# Altium PCB weihnachten.PcbDoc
Units mm, origin at the board's own origin, x right, y up, seen from the top; angles counter-clockwise.
Board outline 43.69 x 44.53 mm, 2 copper layers (Top Layer, Bottom Layer); 29 components, 29 nets, 106 pads, 8 vias.
Unrouted connection lines stored in the file: 1.
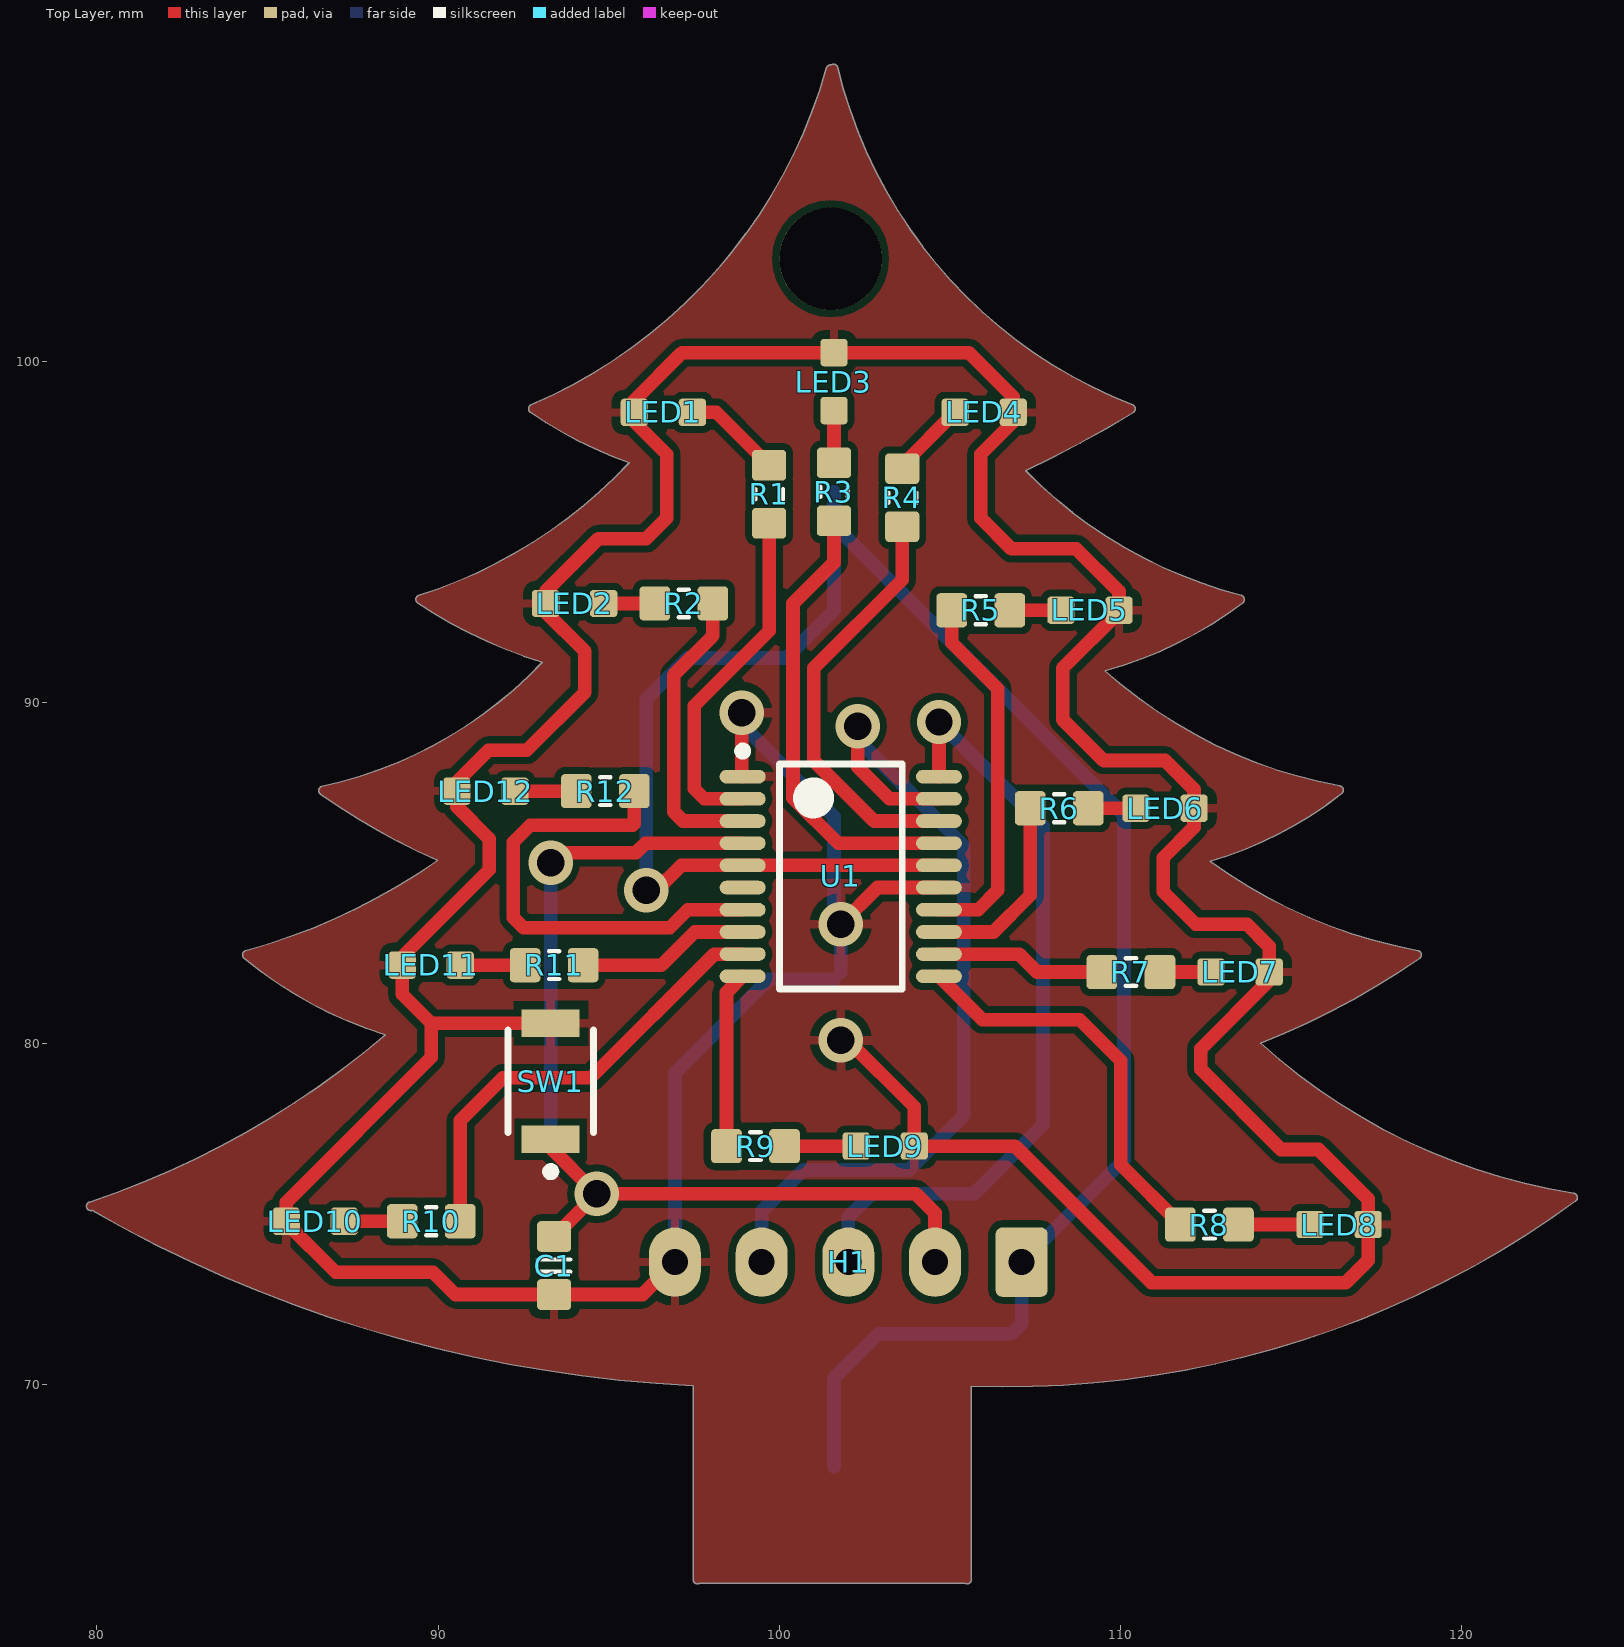
[diagram p0: Top Layer view]
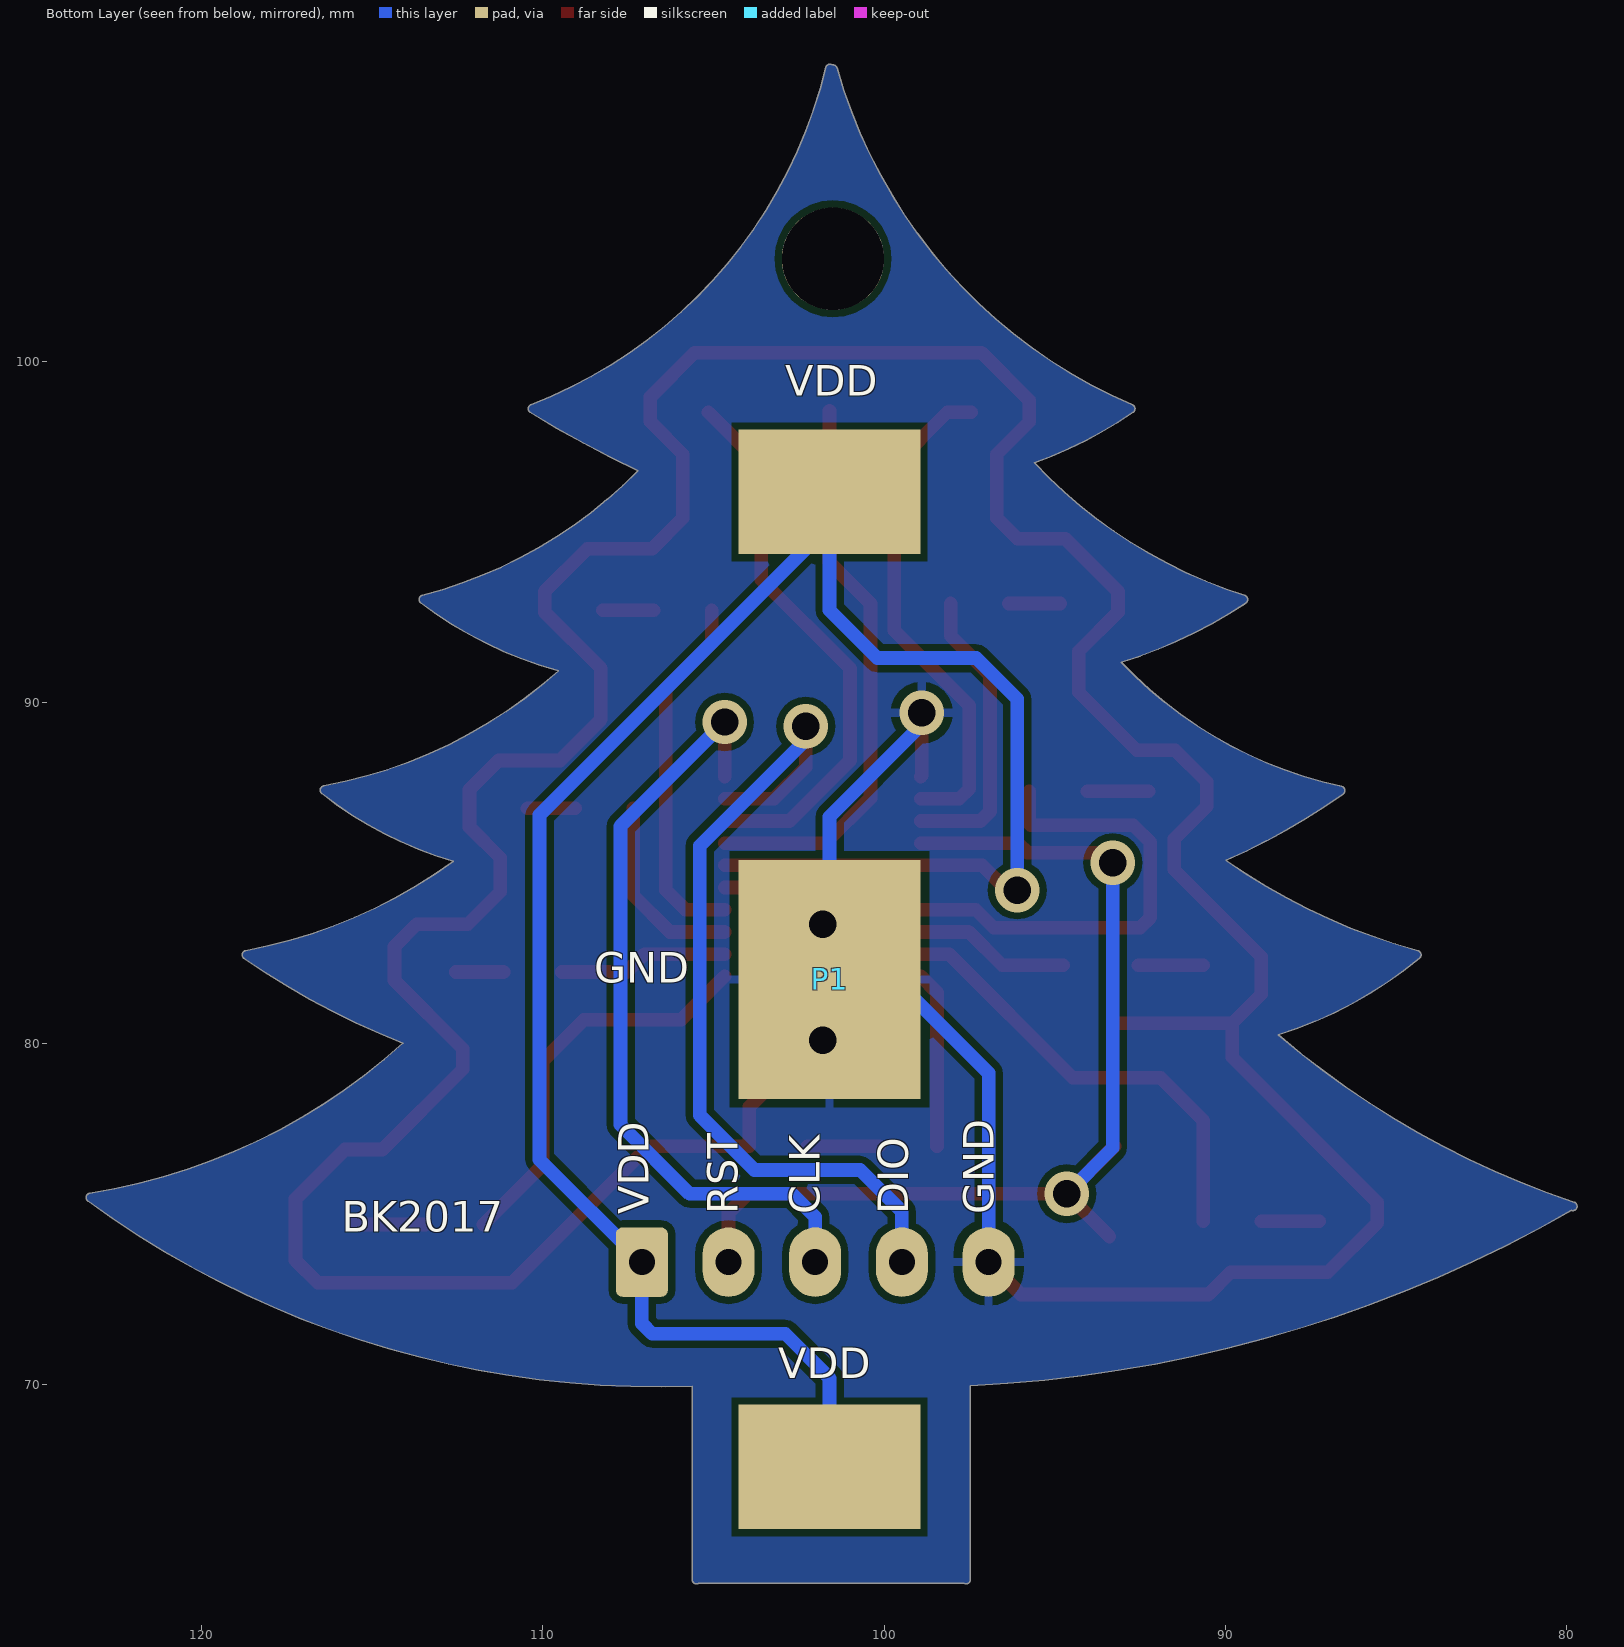
[diagram p1: Bottom Layer view, seen from below]
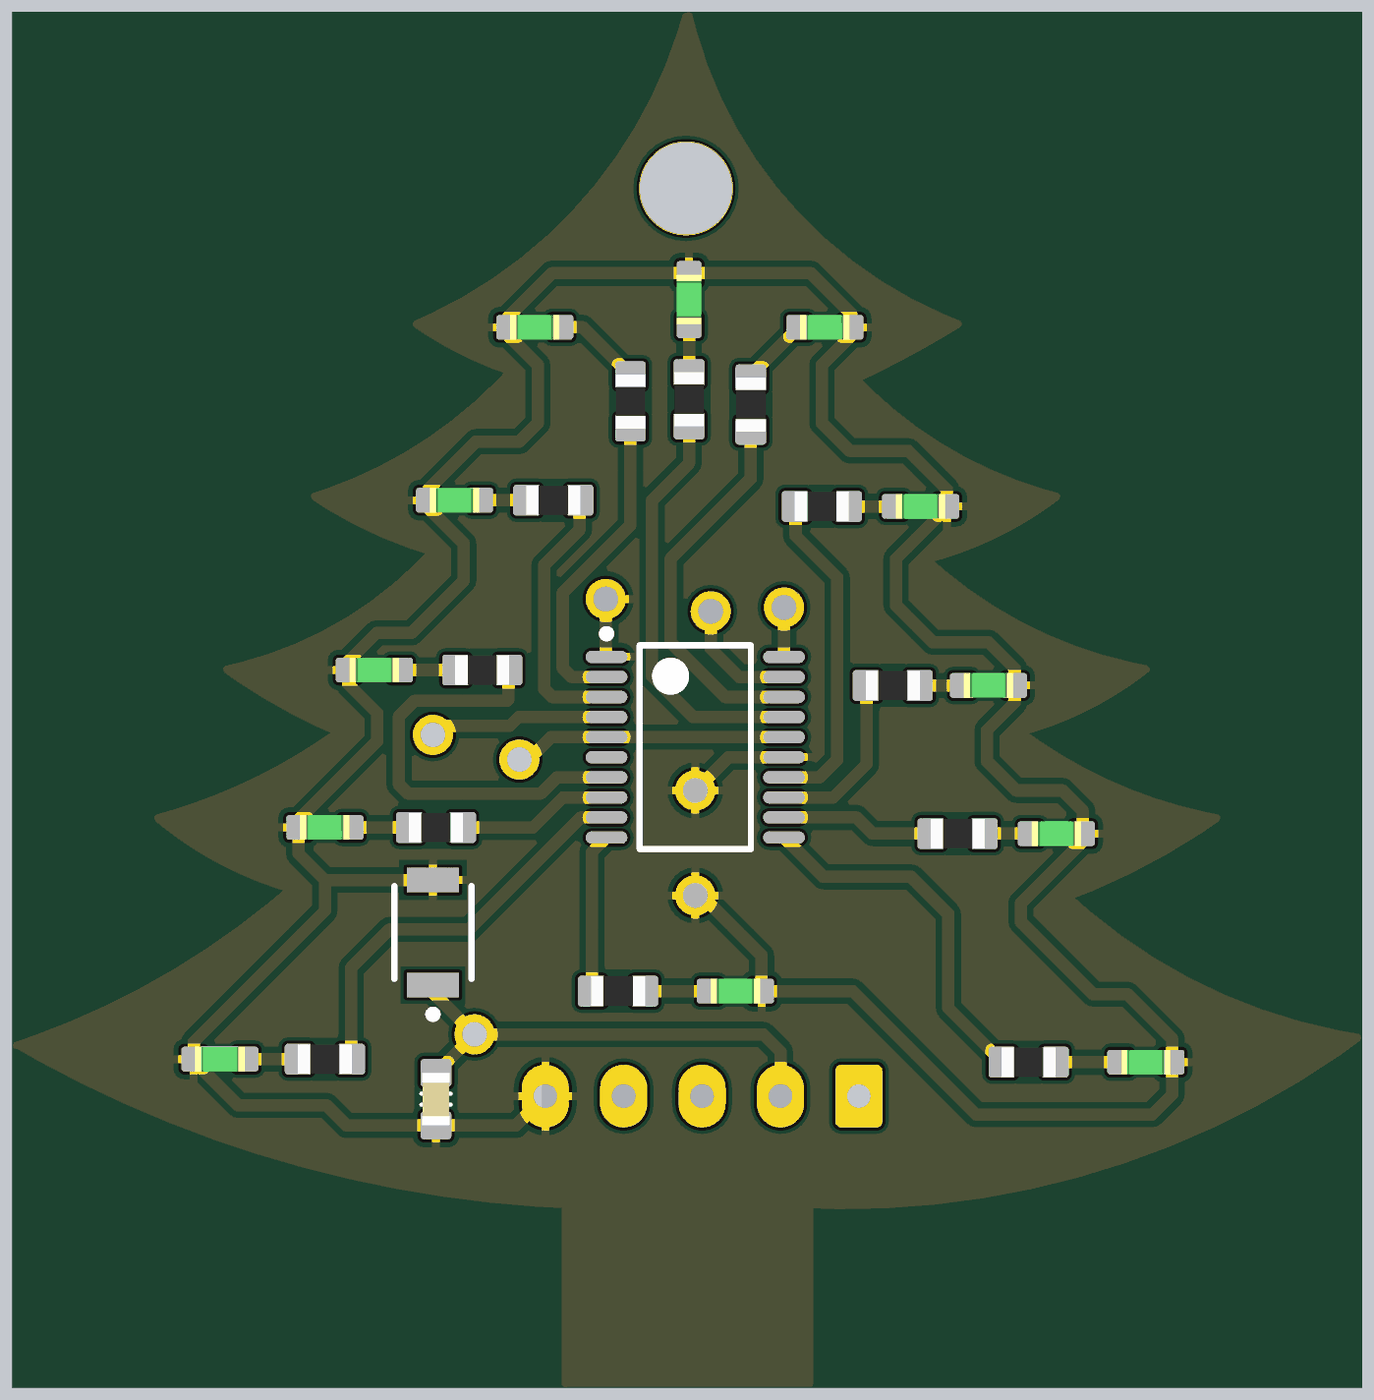
[diagram p2: 3D render of the assembled board from above, using the file's embedded part models]

## Layer stack, top to bottom
Top Solder: solder mask 0.0102, Solder Resist, Dk 3.5
Top Layer: signal copper 0.0356
Dielectric 1: dielectric 0.32, FR-4, Dk 4.8
Bottom Layer: signal copper 0.0356
Bottom Solder: solder mask 0.0102, Solder Resist, Dk 3.5

## Board outline
79.858,75.114 cw(c79.823,75.237) 79.783,75.358 ccw(c71.505,100.113) 88.453,80.261 cw(c92,91.748) 84.314,82.505 cw(c84.395,82.603) 84.268,82.603 cw(c84.395,82.603) 84.361,82.726 ccw(c79.608,100.116) 89.98,85.37 cw(c97.942,103.391) 86.555,87.314 cw(c86.628,87.417) 86.602,87.542 ccw(c83.937,99.814) 93.052,91.176 cw(c97.285,104.782) 89.405,92.911 cw(c89.475,93.017) 89.437,93.139 ccw(c85.083,106.873) 95.599,97.024 cw(c99.762,108.765) 92.705,98.5 cw(c92.777,98.605) 92.727,98.722 ccw(c86.739,112.697) 101.376,108.587 cw(c101.499,108.552) 101.516,108.679 cw(c101.587,108.573) 101.711,108.603 ccw(c115.439,111.89) 110.349,98.724 cw(c110.303,98.605) 110.43,98.605 cw(c110.303,98.605) 110.37,98.496 cw(c92.65,127.434) 107.216,96.788 ccw(c116.937,106.327) 113.532,93.14 cw(c113.5,93.017) 113.627,93.017 cw(c113.5,93.017) 113.577,92.915 cw(c106.333,102.494) 109.546,90.922 ccw(c118.983,101.487) 116.421,87.554 ccw(c118.983,101.487) 116.422,87.554 116.421,87.554 cw(c116.399,87.429) 116.526,87.429 cw(c116.399,87.429) 116.477,87.329 cw(c109.351,96.446) 112.62,85.345 ccw(c121.488,97.586) 118.708,82.728 cw(c118.685,82.603) 118.812,82.603 cw(c118.685,82.603) 118.758,82.498 cw(c105.931,100.982) 114.097,80.018 ccw(c126.093,93.266) 123.277,75.617 cw(c123.257,75.491) 123.384,75.491 cw(c123.257,75.491) 123.332,75.388 cw(c106.668,98.192) 105.627,69.968 105.627,64.3 cw(c105.5,64.3) 105.44,64.188 97.66,64.188 cw(c97.6,64.3) 97.473,64.3 97.473,69.978 cw(c99.31,109.053)

## Design rules (kind name [scope] priority, off if disabled: settings)
Clearance [All] p1: gap=0.203 ignorepadtopadclearanceinfootprint=FALSE
HoleSize [All] p1: absolutevalues=TRUE maxlimit=2.54 minlimit=0.3 maxpercent=80.000 minpercent=20.000
PolygonConnect [All] p1: connectstyle=Relief reliefconductorwidth=0.254 reliefentries=4 polygonreliefangle="90 Angle" airgapwidth=0.254
RoutingVias [All] p1: holewidth=0.8 width=1.2 viastyle="Through Hole" minholewidth=0.8 minwidth=1.2 maxholewidth=1 maxwidth=1.6
SolderMaskExpansion [All] p1: expansion=0.102
Width [All] p1: maxlimit=0.6 minlimit=0.3 preferedwidth=0.3
29 further rules are at their usual default settings.

## Components (designator, comment, footprint, x,y, rotation, side; value= is the part's Value field where it differs from the comment)
C1 "CAPC_2u2_0603_10V_10%" CAPC1608X90N 93.4,73.5 r90 top value=100n
H1 "Programmer" HDR1X5_2.54MMP 107.1,73.6 r180 top
LED1 "Green" LED-0603-GREEN 96.6,98.5 r180 top
LED2 "Green" LED-0603-GREEN 94,92.9 r180 top
LED3 "Green" LED-0603-GREEN 101.6,99.4 r90 top
LED4 "Green" LED-0603-GREEN 106,98.5 r0 top
LED5 "Green" LED-0603-GREEN 109.1,92.7 r0 top
LED6 "Green" LED-0603-GREEN 111.3,86.9 r0 top
LED7 "Green" LED-0603-GREEN 113.5,82.1 r0 top
LED8 "Green" LED-0603-GREEN 116.4,74.7 r0 top
LED9 "Green" LED-0603-GREEN 103.1,77 r0 top
LED10 "Green" LED-0603-GREEN 86.4,74.798 r180 top
LED11 "Green" LED-0603-GREEN 89.8,82.3 r180 top
LED12 "Green" LED-0603-GREEN 91.4,87.4 r180 top
P1 "BC-2013" BC-2013-ND 101.6,67.6 r90 bottom
R1 "Thick Film" RESC1608X55N 99.7,96.1 r90 top value=1K
R2 "Thick Film" RESC1608X55N 97.2,92.9 r180 top value=1K
R3 "Thick Film" RESC1608X55N 101.6,96.17 r90 top value=1K
R4 "Thick Film" RESC1608X55N 103.6,96 r90 top value=1K
R5 "Thick Film" RESC1608X55N 105.9,92.7 r0 top value=1K
R6 "Thick Film" RESC1608X55N 108.2,86.9 r0 top value=1K
R7 "Thick Film" RESC1608X55N 110.3,82.1 r0 top value=1K
R8 "Thick Film" RESC1608X55N 112.6,74.7 r0 top value=1K
R9 "Thick Film" RESC1608X55N 99.3,77 r0 top value=1K
R10 "Thick Film" RESC1608X55N 89.8,74.798 r180 top value=1K
R11 "Thick Film" RESC1608X55N 93.4,82.3 r180 top value=1K
R12 "Thick Film" RESC1608X55N 94.9,87.4 r180 top value=1K
SW1 "B3U-1000P" OMRON-B3U-1000_V 93.3,78.9 r90 top
U1 "STM32L031F6" STM32L031F6 101.8,84.9 r0 top

## Footprints (in the part's own frame and the unit in brackets; to place one, negate y for a bottom-side part, rotate by r counter-clockwise, add the part's x,y. Pads: shape width x height; smd on the part's side, far side on the other; paste and mask are expansions set on the pad)
BC-2013-ND [mm]
  rect 3.65x5.33 smd: 1(0,0) 1(28.57,0)
  rect 7x5.33 smd: 2(14.285,0)
  body extent -1.7,-4.76 30.3,4.76, height 3.68
CAPC1608X90N [mm] "Chip Capacitor, Body 1.6x0.8mm, EIA 0603, IPC Medium Density"
  round 0.254 on Mech15: 0(0,0)
  rrect25% 0.9x1 smd: 1(-0.85,0) 2(0.85,0)
  Top Layer pour cut-out: -0.6,0.5 -0.4,0.7 0.4,0.7 0.6,0.5 0.6,-0.5 0.4,-0.7 -0.4,-0.7 -0.6,-0.5
  silkscreen extent -0.18,-0.48 0.18,0.48, body extent -0.85,-0.45 0.85,0.45, height 0.89
HDR1X5_2.54MMP [mil] "Connector; Header; 5 Position 0.100\" pitch"
  rrect25% 60x80 hole 30: 1(0,0)
  oval 60x80 hole 30: 2(100,0) 3(200,0) 4(300,0) 5(400,0)
LED-0603-GREEN [mm]
  round 0.254 on Mech15: 0(0,0)
  rrect25% 0.8x0.8 smd: A(-0.85,0) K(0.85,0)
  Top Layer pour cut-out: -0.5,0.5 0.5,0.5 0.5,-0.5 -0.5,-0.5
  body extent -0.8,-0.4 0.8,0.4, height 0.75
OMRON-B3U-1000_V [mm] "SMD, 2-Leads, Body 3x2.5mm"
  rect 0.8x1.7 smd: 1(-1.7,0) 2(1.7,0)
  silkscreen extent -2.77,-1.25 1.5,1.25, body extent -1.5,-1.25 1.5,1.25, height 1.75
RESC1608X55N [mm] "Chip Resistor, Body 1.6x0.8mm, EIA 0603, IPC Medium Density"
  round 0.254 on Mech15: 0(0,0)
  rrect25% 0.9x1 smd: 1(-0.85,0) 2(0.85,0)
  Top Layer pour cut-out: -0.6,0.5 -0.4,0.7 0.4,0.7 0.6,0.5 0.6,-0.5 0.4,-0.7 -0.4,-0.7 -0.6,-0.5
  silkscreen extent -0.15,-0.41 0.15,0.41, body extent -0.87,-0.47 0.88,0.48, height 0.54
STM32L031F6 [mm] "TSOP, 20-Leads, Body 6,50x4,40mm, Pitch 0,65mm, IPC Medium Density"
  oval 1.35x0.4 smd: 1(-2.875,2.925) 2(-2.875,2.275) 3(-2.875,1.625) 4(-2.875,0.975) 5(-2.875,0.325) 6(-2.875,-0.325) 7(-2.875,-0.975) 8(-2.875,-1.625) 9(-2.875,-2.275) 10(-2.875,-2.925) 11(2.875,-2.925) 12(2.875,-2.275) 13(2.875,-1.625) 14(2.875,-0.975) 15(2.875,-0.325) 16(2.875,0.325) 17(2.875,0.975) 18(2.875,1.625) 19(2.875,2.275) 20(2.875,2.925)
  silkscreen extent -3,-3.3 1.8,3.8, body extent -2.2,-3.3 2.2,3.3, height 1.2

## Part data
C1: "Capacitor SMD Cer 2.2uF 10% 10V X5R 0603", Manufacturer 1="AVX Corporation", Manufacturer Part Number 1=0603ZD225KAT2A, Package / Case="0603 (1608 metric)", Ratings="10V; X5R", Supplier Part Number 1=478-6212-1-ND, Tolerance=±10%, ComponentLink1Description=http://www.avx.com/docs/Catalogs/cx5r.pdf, ComponentLink1URL=http://www.avx.com/docs/Catalogs/cx5r.pdf, Material=ceramic, SCDType=spec, Supplier 1=Digi-Key
H1: library part Header5P, "Header 5-pin"
LED1 LED2 LED3 LED4 LED5 LED6 LED7 LED8 LED9 LED10 LED11 LED12: library part LED_SMD_Green_0603_570nm, "LED 0603 SMD Green 570nm 50mcd 20mA", Current - Test=20mA, Manufacturer 1="Kingbright Company LLC", Manufacturer Part Number 1=APT1608CGCK, Package / Case="0603 (1608 metric)", Ratings="20mcd min; 50 mcd typ; 570 nm", Supplier Part Number 1=754-1116-1-ND, Voltage - Forward (Vf) @ 10mA=2.0V, Voltage - Forward (Vf) Typ=2.1V, Color=Green, ComponentLink1Description=http://www.us.kingbright.com/images/catalog/SPEC/APT1608CGCK.pdf, ComponentLink1URL=http://www.us.kingbright.com/images/catalog/SPEC/APT1608CGCK.pdf, Lens Style/Size="Rectangle with Flat Top, 1.1mm x 0.8mm", Lens Type=Clear, Material=AlGaInP, RoHS 1="RoHS Compliant", SCDType=source, Supplier 1=Digi-Key, Viewing Angle=120°, Wavelength - Dominant=570nm, Wavelength - Peak=574nm
R1 R2 R3 R4 R5 R6 R7 R8 R9 R10 R11 R12: library part RES_1K_0603_1%, "Resistor SMD chip 1k Ohm 0.1W 1% 0603", Manufacturer 1=Yageo, Manufacturer Part Number 1=RC0603FR-071KL, Package / Case="0603 (1608 Metric)", Ratings=1/10W, Supplier Part Number 1=311-1.00KHRCT-ND, Tolerance=±1%, SCDType=spec, Supplier 1=Digi-Key
SW1: library part CMP-2100-03586-1, "Ultra-Small Tactile Switch, 0.05 A, 12 V, -25 to 70 degC, 2-Pin SMD, RoHS, Tape and Reel", Case/Package=SMD/SMT, Contact Current Rating=50mA, Insulation Resistance=100MOhm, Manufacturer="Omron Electronic Components", Max Operating Temperature=70degC, Min Operating Temperature=-25degC, Operating Force=1.5N, Package Description="2-Pin Surface Mount Device, Body 3 x 2.5 mm", Package Quantity=1, Package Reference=B3U-1000, Supplier Part Number 1=SW1020DKR-ND, Voltage Rating (DC)=12V, Actuator Length=0.4mm, Contact Material=Silver, Current Rating=50mA, Datasheet URL=http://www.omron.com/ecb/products/pdf/en-b3u.pdf, Datasheet Version=42005.0, Depth=2.5mm, Electrical Life=200000Cycles, Height=1.2mm, Illumination Type=Illuminated, Lead Free=LeadFree, Length=4mm, Manufacturer URL=http://www.omron.com/, Max Current Rating=50mA, Mount=SurfaceMount, Orientation=Straight, Packaging=TapeandReel, REACH SVHC=Unknown, RoHSCompliant=true, Supplier 1=Digi-Key, Switch Travel=0.15mm, Termination=SMD/SMT, Throw Configuration=SPST, Weight=0.022g, Width=3mm

## Free pads (board coordinates)
  round 3 hole 3: 7(101.5,103)

## Via types
v1: diameter 1.3, hole 0.8, Top Layer to Bottom Layer, 8 vias

## Nets (pads, with @x,y where several pads share a name; then routed paths per layer and width w, separated by ;. In a path a pad name is that pad's centre, name@x,y a point inside that pad or via, vN(x,y) a via of type N, cw(c..) or ccw(c..) an arc to the next point about the centre after c; other vN are vias at no path point)
GND: C1.1 H1.5 LED1.K LED2.K LED3.K LED4.K LED5.K LED6.K LED7.K LED8.K LED9.K LED10.K LED11.K LED12.K P1.2 SW1.2 U1.1 U1.15 | length 143.9
  Top Layer w0.4: SW1.2 89.8,80.6 ; H1.5 95.99,72.65 C1.1 90.5,72.65 89.85,73.3 87,73.3 85.55,74.75 LED10.K 85.55,75.35 89.8,79.6 89.8,80.6 ; v1(98.9,89.7) 98.9,87.85 U1.1 ; v1(101.8,80.1) 102,80.1 103.95,78.15 LED9.K 106.9,77 110.9,73 116.6,73 117.25,73.65 LED8.K 117.25,75.45 115.8,76.9 114.7,76.9 112.35,79.25 112.35,79.85 114.35,81.85 LED7.K 114.35,82.85 113.7,83.5 112.2,83.5 111.25,84.45 111.25,85.45 112.15,86.35 LED6.K 112.15,87.45 111.3,88.3 109.5,88.3 108.3,89.5 108.3,91 109.95,92.65 LED5.K 109.95,93.25 108.7,94.5 106.8,94.5 105.9,95.4 105.9,97.275 106.85,98.225 LED4.K 106.85,98.95 105.55,100.25 LED3.K 97.15,100.25 95.75,98.85 LED1.K 95.75,98.225 96.7,97.275 96.7,95.4 96.1,94.8 94.7,94.8 93.15,93.25 LED2.K 93.15,92.65 94.3,91.5 94.3,90.3 92.6,88.6 91.475,88.6 90.55,87.675 LED12.K 90.55,86.95 91.5,86 91.5,85.1 88.95,82.55 LED11.K 88.95,81.45 89.8,80.6 ; v1(101.8,83.5) 102.875,84.575 U1.15
  Bottom Layer w0.4: H1.5 96.94,79.14 99.685,81.885 P1.2 ; v1(98.9,89.7) 98.9,89.35 101.6,86.65 P1.2@101.6,83.5 ; P1.2@101.8,82.085 v1(101.8,83.5)
LED1: R1.1 U1.2 | length 10.2
  Top Layer w0.4: U1.2 97.8,87.175 97.503,87.472 97.503,89.903 99.7,92.1 R1.1
LED2: R2.1 U1.3 | length 8.7
  Top Layer w0.4: R2.1 98.05,91.95 96.9,90.8 96.9,86.8 97.175,86.525 U1.3
LED3: R3.1 U1.17 | length 13.4
  Top Layer w0.4: R3.1 101.6,94.1 100.4,92.9 100.4,87.2 101.725,85.875 U1.17
LED4: R4.1 U1.18 | length 12.3
  Top Layer w0.4: R4.1 103.6,93.597 101.003,91 101.003,88.297 102.775,86.525 U1.18
LED5: R5.1 U1.14 | length 10.7
  Top Layer w0.4: U1.14 105.825,83.925 106.4,84.5 106.4,90.4 105.05,91.75 R5.1
LED6: R6.1 U1.13 | length 5.7
  Top Layer w0.4: U1.13 106.275,83.275 107.35,84.35 R6.1
LED7: R7.1 U1.12 | length 5
  Top Layer w0.4: U1.12 107.025,82.625 107.55,82.1 R7.1
LED8: R8.1 U1.11 | length 11.9
  Top Layer w0.4: U1.11 105.95,80.7 108.8,80.7 110,79.5 110,76.45 R8.1
LED9: R9.1 U1.10 | length 5.2
  Top Layer w0.4: R9.1 98.45,81.5 U1.10
LED10: R10.1 U1.9 | length 13.2
  Top Layer w0.4: R10.1 90.65,77.75 91.9,79 94.475,79 98.1,82.625 U1.9
LED11: R11.1 U1.8 | length 4.6
  Top Layer w0.4: 94.75,82.3 96.542,82.3 97.517,83.275 U1.8
LED12: R12.1 U1.7 | length 14
  Top Layer w0.4: R12.1 95.75,86.45 95.7,86.4 92.7,86.4 92.2,85.9 92.2,83.7 92.5,83.4 96.789,83.4 97.314,83.925 U1.7
NetLED1_A: LED1.A R1.2 | length 2.9
  Top Layer w0.4: LED1.A 98.15,98.5 R1.2
NetLED2_A: LED2.A R2.2 | length 1.5
  Top Layer w0.4: LED2.A R2.2
NetLED3_A: LED3.A R3.2 | length 1.5
  Top Layer w0.4: R3.2 LED3.A
NetLED4_A: LED4.A R4.2 | length 2.3
  Top Layer w0.4: R4.2 103.6,96.95 LED4.A
NetLED5_A: LED5.A R5.2 | length 1.5
  Top Layer w0.4: R5.2 LED5.A
NetLED6_A: LED6.A R6.2 | length 1.4
  Top Layer w0.4: R6.2 LED6.A
NetLED7_A: LED7.A R7.2 | length 1.4
  Top Layer w0.4: R7.2 LED7.A@112.55,82.1
NetLED8_A: LED8.A R8.2 | length 2.1
  Top Layer w0.4: R8.2 LED8.A
NetLED9_A: LED9.A R9.2 | length 2.1
  Top Layer w0.4: R9.2 LED9.A
NetLED10_A: LED10.A R10.2 | length 1.7
  Top Layer w0.4: LED10.A R10.2
NetLED11_A: LED11.A R11.2 | length 1.9
  Top Layer w0.4: LED11.A R11.2
NetLED12_A: LED12.A R12.2 | length 1.8
  Top Layer w0.4: LED12.A R12.2
NRST: C1.2 H1.2 SW1.1 U1.4 | length 31.4
  Top Layer w0.4: SW1.1@93.25,77 v1@94.6,75.65 ; v1(93.3,85.3) 93.6,85.6 95.8,85.6 96.075,85.875 U1.4 ; C1.2 v1(94.65,75.6) 104,75.6 104.56,75.04 H1.2
  Bottom Layer w0.4: v1(93.3,85.3) 93.3,76.95 v1(94.65,75.6)
SWCLK: H1.3 U1.20 | length 22.8
  Top Layer w0.4: U1.20 v1(104.675,89.425)
  Bottom Layer w0.4: H1.3 102.02,74.92 102.7,75.6 105.7,75.6 107.725,77.625 107.725,86.375 v1(104.675,89.425)
SWDIO: H1.4 U1.19 | length 25.2
  Top Layer w0.4: v1(102.3,89.3) 102.3,88.1 103.225,87.175 U1.19
  Bottom Layer w0.4: H1.4 99.48,75.08 100.7,76.3 103.8,76.3 105.4,77.9 105.4,85.8 102.3,88.9 v1(102.3,89.3)
VCC: H1.1 P1.1 U1.5 U1.16 | length 61.4
  Top Layer w0.4: v1(96.1,84.5) 96.4,84.5 97.125,85.225 U1.5 U1.16 ; H1.1 H1.1@107.5,74
  Bottom Layer w0.4: v1(96.1,84.5) 96.1,90.1 97.3,91.3 100.2,91.3 101.6,92.7 P1.1@101.6,95.2 ; P1.1@101.6,67.6 101.6,70.2 102.9,71.5 106.8,71.5 107.1,71.8 H1.1@107.1,73 ; P1.1@101.6,96.17 P1.1@101.6,95.2 ; H1.1 110.1,76.6 110.1,86.7 P1.1@101.6,95.2
pads on no net: C1.0 LED1.0 LED2.0 LED3.0 LED4.0 LED5.0 LED6.0 LED7.0 LED8.0 LED9.0 LED10.0 LED11.0 LED12.0 R1.0 R2.0 R3.0 R4.0 R5.0 R6.0 R7.0 R8.0 R9.0 R10.0 R11.0 R12.0 U1.6

## Polygon pours and split planes (outlines as drawn)
GND on Top Layer "TOP" (solid, pour order 0): 79.858,75.114 cw(c79.823,75.237) 79.783,75.358 ccw(c71.505,100.113) 88.453,80.261 cw(c92,91.748) 84.314,82.505 cw(c84.395,82.603) 84.268,82.603 cw(c84.395,82.603) 84.361,82.726 ccw(c79.608,100.116) 89.98,85.37 cw(c97.942,103.391) 86.555,87.314 cw(c86.628,87.417) 86.602,87.542 ccw(c83.937,99.814) 93.052,91.176 cw(c97.285,104.782) 89.405,92.911 cw(c89.475,93.017) 89.437,93.139 ccw(c85.083,106.873) 95.599,97.024 cw(c99.762,108.765) 92.705,98.5 cw(c92.777,98.605) 92.727,98.722 ccw(c86.739,112.697) 101.376,108.587 cw(c101.499,108.552) 101.516,108.679 cw(c101.587,108.573) 101.711,108.603 ccw(c115.439,111.89) 110.349,98.724 cw(c110.303,98.605) 110.43,98.605 cw(c110.303,98.605) 110.37,98.496 cw(c92.65,127.434) 107.216,96.788 ccw(c116.937,106.327) 113.532,93.14 cw(c113.5,93.017) 113.627,93.017 cw(c113.5,93.017) 113.577,92.915 cw(c106.333,102.494) 109.546,90.922 ccw(c118.983,101.487) 116.421,87.554 ccw(c119.025,101.513) 116.422,87.554 116.421,87.554 cw(c116.399,87.429) 116.526,87.429 cw(c116.399,87.429) 116.477,87.329 cw(c109.35,96.446) 112.62,85.345 ccw(c121.488,97.586) 118.708,82.728 cw(c118.685,82.603) 118.812,82.603 cw(c118.685,82.603) 118.758,82.498 cw(c105.931,100.982) 114.097,80.018 ccw(c126.093,93.266) 123.277,75.617 cw(c123.257,75.491) 123.384,75.491 cw(c123.257,75.491) 123.332,75.388 cw(c106.668,98.192) 105.627,69.968 105.627,64.3 cw(c105.5,64.3) 105.44,64.188 97.66,64.188 cw(c97.6,64.3) 97.473,64.3 97.473,69.978 cw(c99.31,109.053)
GND on Bottom Layer "BOT" (solid, pour order 1): 79.858,75.114 cw(c79.823,75.237) 79.783,75.358 ccw(c71.505,100.113) 88.453,80.261 cw(c92,91.748) 84.314,82.505 cw(c84.395,82.603) 84.268,82.603 cw(c84.395,82.603) 84.361,82.726 ccw(c79.608,100.116) 89.98,85.37 cw(c97.942,103.391) 86.555,87.314 cw(c86.628,87.417) 86.602,87.542 ccw(c83.937,99.814) 93.052,91.176 cw(c97.285,104.782) 89.405,92.911 cw(c89.475,93.017) 89.437,93.139 ccw(c85.083,106.873) 95.599,97.024 cw(c99.762,108.765) 92.705,98.5 cw(c92.777,98.605) 92.727,98.722 ccw(c86.739,112.697) 101.376,108.587 cw(c101.499,108.552) 101.516,108.679 cw(c101.587,108.573) 101.711,108.603 ccw(c115.439,111.89) 110.349,98.724 cw(c110.303,98.605) 110.43,98.605 cw(c110.303,98.605) 110.37,98.496 cw(c92.65,127.434) 107.216,96.788 ccw(c116.937,106.327) 113.532,93.14 cw(c113.5,93.017) 113.627,93.017 cw(c113.5,93.017) 113.577,92.915 cw(c106.333,102.494) 109.546,90.922 ccw(c118.983,101.487) 116.421,87.554 ccw(c119.025,101.513) 116.422,87.554 116.421,87.554 cw(c116.399,87.429) 116.526,87.429 cw(c116.399,87.429) 116.477,87.329 cw(c109.35,96.446) 112.62,85.345 ccw(c121.488,97.586) 118.708,82.728 cw(c118.685,82.603) 118.812,82.603 cw(c118.685,82.603) 118.758,82.498 cw(c105.931,100.982) 114.097,80.018 ccw(c126.093,93.266) 123.277,75.617 cw(c123.257,75.491) 123.384,75.491 cw(c123.257,75.491) 123.332,75.388 cw(c106.668,98.192) 105.627,69.968 105.627,64.3 cw(c105.5,64.3) 105.44,64.188 97.66,64.188 cw(c97.6,64.3) 97.473,64.3 97.473,69.978 cw(c99.31,109.053)

## Silkscreen, mask and mechanical layers (free items; w line width, h text height)
Bottom Overlay:
  text "VDD" at 102.9,98.7 h1.52
  text "GND" at 108.5,81.5 h1.52
  text "GND" at 96.5,75 h1.52 r270
  text "DIO" at 99,75 h1.52 r270
  text "CLK" at 101.6,75 h1.52 r270
  text "RST" at 104,75 h1.52 r270
  text "VDD" at 106.6,75 h1.52 r270
  text "BK2017" at 115.9,74.2 h1.52
  text "VDD" at 103.1,69.9 h1.52
Mechanical 1:
  lines w0.254: 79.823,75.237 ccw(c71.505,100.113) 88.713,80.317 cw(c92,91.748) 84.395,82.603 ccw(c79.608,100.116) 90.237,85.397 cw(c97.942,103.391) 86.628,87.417 ccw(c83.937,99.814) 93.285,91.239 cw(c97.285,104.782) 89.475,93.017 ccw(c85.083,106.873) 95.825,97.081 cw(c99.762,108.765) 92.777,98.605 ccw(c86.739,112.697) 101.499,108.552 ; 79.9,75.237 ccw(c99.31,109.053) 97.6,70.1 97.6,64.3 ; 97.603,64.315 105.477,64.315 ; 101.587,108.573 ccw(c115.439,111.89) 110.303,98.605 cw(c92.65,127.434) 107.001,96.827 ccw(c116.937,106.327) 113.5,93.017 cw(c106.333,102.494) 109.287,90.985 ccw(c118.983,101.487) 116.399,87.429 cw(c109.351,96.446) 112.335,85.397 ccw(c121.488,97.586) 118.685,82.603 cw(c105.931,100.982) 113.859,80.063 ccw(c126.093,93.266) 123.257,75.491 cw(c106.668,98.192) 105.5,70.1 105.5,64.3